# Altium PCB volt_sense.PcbDoc
Units mil, origin at the board's own origin, x right, y up, seen from the top; angles counter-clockwise.
Board outline 1299.21 x 4291.34 mil, 2 copper layers (Top Layer, Bottom Layer); 25 components, 14 nets, 66 pads, 3 vias.
Unrouted connection lines stored in the file: 5.
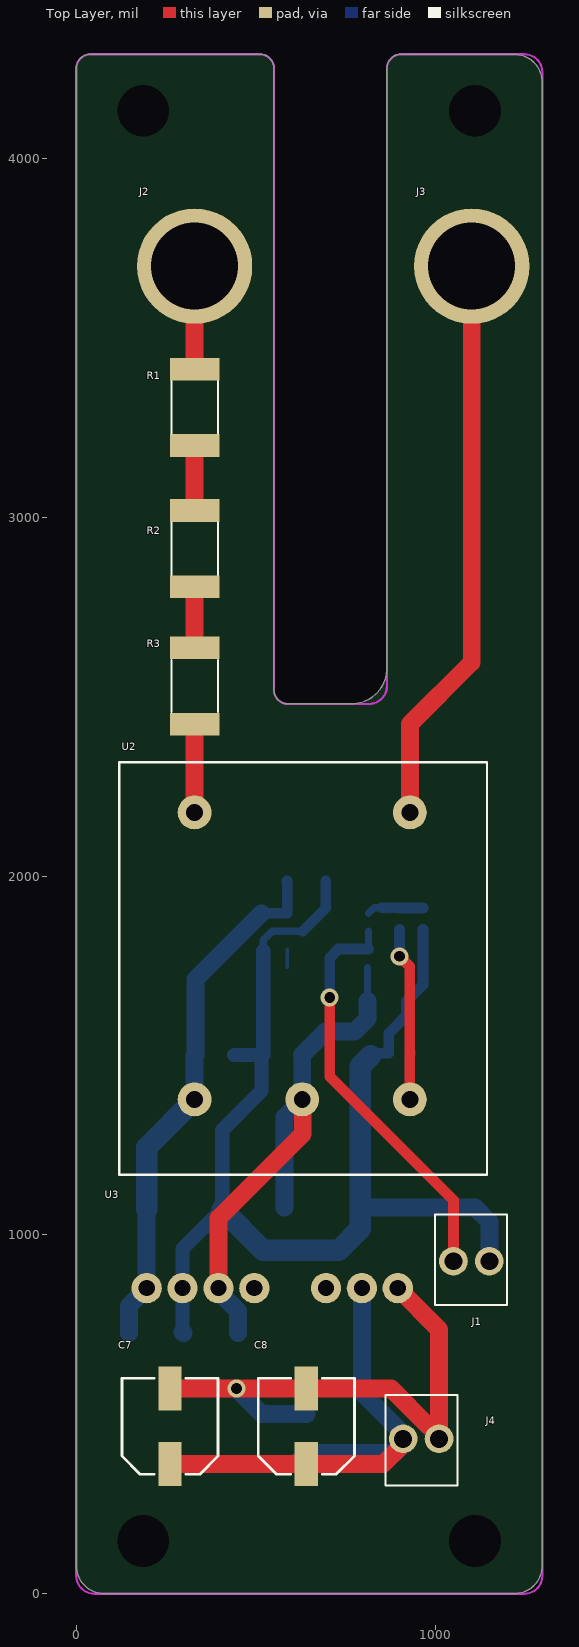
[diagram p0: Top Layer view]
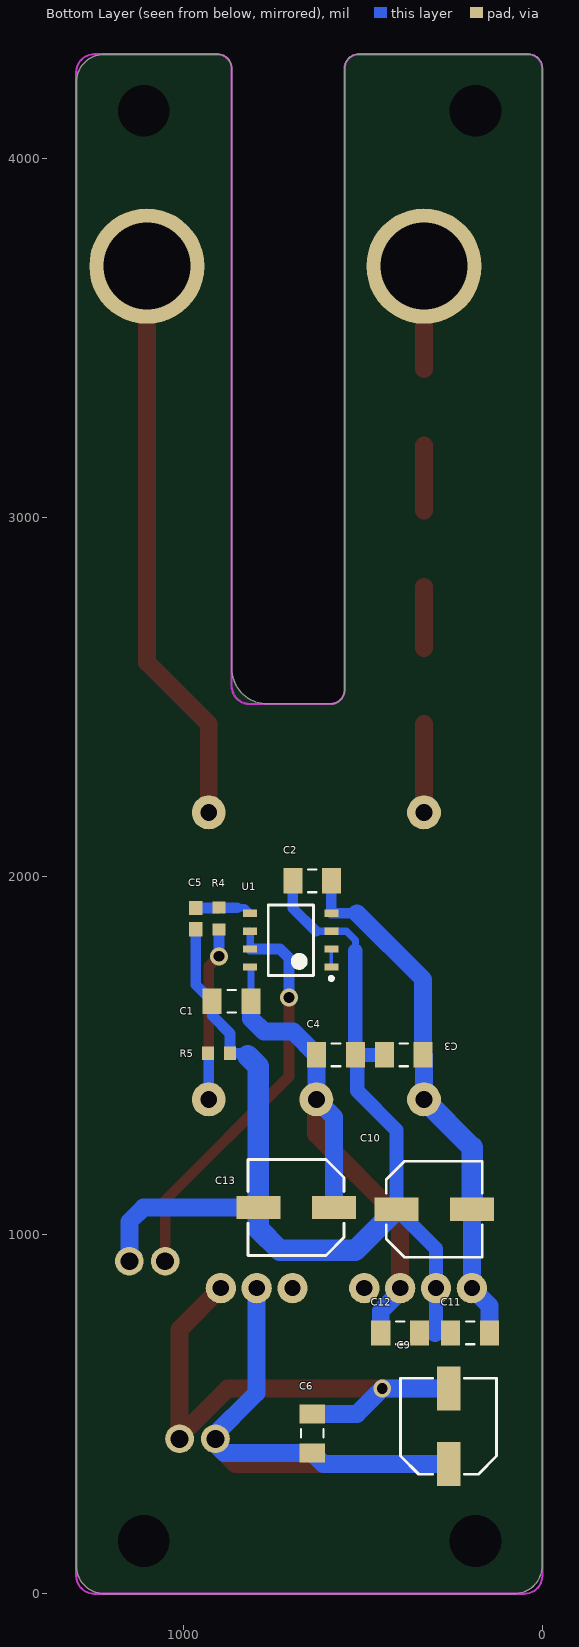
[diagram p1: Bottom Layer view, seen from below]

## Layer stack, top to bottom
Top Solder: solder mask 0.4, Solder Resist, Dk 3.5
Top Layer: signal copper 1.4
Dielectric 1: dielectric 12.6, FR-4, Dk 4.8
Bottom Layer: signal copper 1.4
Bottom Solder: solder mask 0.4, Solder Resist, Dk 3.5

## Board outline
0,4251.97 cw(c39.37,4251.97) 39.37,4291.34 511.81,4291.34 cw(c511.81,4251.97) 551.18,4251.97 551.18,2519.68 ccw(c590.55,2519.68) 590.55,2480.32 766.14,2480.32 ccw(c766.14,2580.32) 866.14,2580.32 866.14,4251.97 cw(c905.51,4251.97) 905.51,4291.34 1220.47,4291.34 cw(c1220.47,4212.6) 1299.21,4212.6 1299.21,78.74 cw(c1220.47,78.74) 1220.47,0 78.74,0 cw(c78.74,78.74) 0,78.74

## Design rules (kind name [scope] priority, off if disabled: settings)
Clearance [All] p1: gap=10 ignorepadtopadclearanceinfootprint=FALSE except(0: Arc-Hole Track-Hole SMDPad-Hole THPad-Hole Via-Hole Fill-Hole Poly-Hole Region-Hole Text-Hole)
PolygonConnect [All] p1: connectstyle=Relief reliefconductorwidth=10 reliefentries=4 polygonreliefangle="90 Angle" airgapwidth=10
RoutingVias [All] p1: holewidth=28 width=50 viastyle="Through Hole" minholewidth=28 minwidth=50 maxholewidth=28 maxwidth=50
SolderMaskExpansion [All] p1: expansion=4
Width [All] p1: maxlimit=100 minlimit=10 preferedwidth=10
30 further rules are at their usual default settings.

## Components (designator, comment, footprint, x,y, rotation, side; value= is the part's Value field where it differs from the comment)
C1 "33nF" C1206 866.3,1651.89 r0 bottom
C2 "33nF" C1206 641.3,1986.89 r0 bottom
C3 "33nF" C1206 386.3,1501.89 r0 bottom
C4 "33nF" C1206 575.31,1501.89 r180 bottom
C5 "100p" C0603 966.3,1881.89 r90 bottom
C6 "33nF" C1206 641.3,446.89 r270 bottom
C7 "47uF" CAPAE7266X82N 261.3,466.89 r90 top
C8 "47uF" CAPAE7266X82N 641.3,466.89 r90 top
C9 "47uF" CAPAE7266X82N 261.3,466.89 r90 bottom
C10 "47uF" CAPAE7266X82N 301.3,1071.89 r180 bottom
C11 "33nF" C1206 201.3,726.89 r180 bottom
C12 "33nF" C1206 396.3,726.89 r0 bottom
C13 "47uF" CAPAE7266X82N 686.3,1076.89 r0 bottom
J1 "2pin conn" 2pin_0.1in 1051.3,926.89 r0 top
J2 "Jack Conn" 575-4 329.92,3700.79 r0 top
J3 "Jack Conn" 575-4 1102.36,3700.79 r0 top
J4 "2pin conn" 2pin_0.1in 1011.3,431.89 r180 top
R1 "2M, 2W" R2512 329.92,3307.09 r270 top
R2 "2M, 2W" R2512 329.92,2913.39 r270 top
R3 "2M, 2W" R2512 329.92,2530.32 r270 top
R4 "10k" R0603 901.3,1881.89 r90 bottom
R5 "887R" R0603 901.3,1506.89 r0 bottom
U1 "Opamp, 1.1MHz" SO8 701.3,1821.89 r0 bottom
U2 "LV25" LV25-P 329.92,2177.95 r0 top
U3 "RS-2412D" RS2412D 896.3,851.89 r180 top

## Footprints (in the part's own frame and the unit in brackets; to place one, negate y for a bottom-side part, rotate by r counter-clockwise, add the part's x,y. Pads: shape width x height; smd on the part's side, far side on the other; paste and mask are expansions set on the pad)
2pin_0.1in [mil] "2 pin white connector"
  round 80 hole 50: 1(0,0) 2(100,0)
  silkscreen extent -51,-122 150,130, body extent -49,-122 151,128, height 421
575-4 [mm] "CONN BANANA JACK SOLDER"
  round 8.16 hole 6.16: 1(0,0)
  body extent -3.92,-3.66 4,4.26, height 2.37
C0603 [mm] "MLCC 0603 footprint"
  rect 1x0.95 smd: 1(-0.75,0) 2(0.75,0)
  body extent -0.85,-0.45 0.85,0.45, height 0.9
C1206 [mm] "MLCC 1206 footprint"
  rect 1.35x1.8 smd: 1(-1.375,0) 2(1.375,0)
  silkscreen extent -0.3,-0.8 0.3,0.8, body extent -1.7,-0.9 1.7,0.9, height 1.8
CAPAE7266X82N [mm] "Aluminum Electrolytic Capacitor, Body 6.60x6.60x8.20mm, IPC Medium Density"
  rect 3.1x1.65 smd: 1(-2.675,0) 2(2.675,0)
  silkscreen extent -3.4,-3.4 3.4,3.4, body extent -3.4,-3.4 3.4,3.4, height 8.2
LV25-P [mm] "Voltage sensor"
  round 2.4 hole 1.2: 1(15.24,0) 2(0,0) 3(0,-20.32) 4(7.62,-20.32) 5(15.24,-20.32)
  silkscreen extent -5.33,-25.65 20.7,3.56, body extent -5.46,-25.65 20.54,3.55, height 16.51
R0603 [mm] "SMD 0603 resistor footprint"
  rect 0.85x0.95 smd: 1(-0.775,0) 2(0.775,0)
  body extent -0.85,-0.48 0.85,0.48, height 0.6
R2512 [mm] "Chip resistance 2512 footprint"
  rect 1.6x3.5 smd: 1(-2.7,0) 2(2.7,0)
  silkscreen extent -1.85,-1.65 1.85,1.65, body extent -3.25,-1.7 3.25,1.7, height 0.65
RS2412D [mm] "DC DC CONVERTER +/-12V 2W"
  round 2.15 hole 1.15: 1(0,0) 2(2.54,0) 3(5.08,0) 5(10.16,0) 6(12.7,0) 7(15.24,0) 8(17.78,0)
  body extent -1.8,-6 20,3.2, height 11.11
SO8 [mm]
  rect 0.99x0.51 smd: 1(-2.87,1.905) 2(-2.87,0.635) 3(-2.87,-0.635) 4(-2.87,-1.905) 5(2.87,-1.905) 6(2.87,-0.635) 7(2.87,0.635) 8(2.87,1.905)
  silkscreen extent -2.99,-2.5 1.6,2.83, body extent -2,-2.5 2,2.5, height 1.75

## Part data
C1 C2 C3 C4 C6 C11 C12: library part CL31B333JBCNNNC, "Cap Ceramic 0.033uF 50V X7R 5% SMD 1206 125C Paper T/R", Case/Package=1206, Case Code (Metric)=3216, Dielectric=X7R, Manufacturer=Samsung, Max Operating Temperature=125°C, Min Operating Temperature=-55°C, Package Quantity=1, Supplier Part Number 1=1276-1774-6-ND, Tolerance=5%, Voltage=50V, Capacitance=33nF, Case Code (Imperial)=1206, Depth=1.6mm, Height=0.85mm, Lead Free="Lead Free", Length=3.2mm, Manufacturer Part Number=CL31B333JBCNNNC, Mount="Surface Mount", Packaging="Tape and Reel", Pricing 1="1=0.18, 10=0.131, 100=0.0614, 500=0.04308, 1000=0.03567 (USD)", Radiation Hardening=No, Stock 1=21, Supplier 1=Digi-Key, Thickness=0.039inch, Voltage Rating=50V, Voltage Rating (DC)=50V, Width=0.063inch
C5: library part 06035C101KAT2A, "Cap Ceramic 100pF 50V X7R 10% SMD 0603 125C T/R", Capacitance=100pF, Case/Package=0603, Case Code (Metric)=1608, Dielectric=X7R, Dielectric Material=Ceramic, Manufacturer="Kyocera AVX", Max Operating Temperature=125°C, Min Operating Temperature=-55°C, Package Quantity=1, Supplier Part Number 1=581-06035C101K, Temperature Coefficient=0ppm/°C, Tolerance=10%, Voltage Rating=50V, Case Code (Imperial)=0603, ComponentLink1Description=http://www.mouser.com/ds/2/40/X7RDielectric-777024.pdf?src-supplier=Mouser, ComponentLink1URL=http://www.mouser.com/ds/2/40/X7RDielectric-777024.pdf?src-supplier=Mouser, ComponentLink2Description=http://www.farnell.com/datasheets/1679506.pdf?src-supplier=Element14, ComponentLink2URL=http://www.farnell.com/datasheets/1679506.pdf?src-supplier=Element14, ComponentLink3Description=http://www.jameco.com/Jameco/Products/ProdDS/2012486.pdf?src-supplier=Jameco, ComponentLink3URL=http://www.jameco.com/Jameco/Products/ProdDS/2012486.pdf?src-supplier=Jameco, ComponentLink4Description=http://www.avx.com/docs/Catalogs/cx7r.pdf?src-supplier=Future+Electronics, ComponentLink4URL=http://www.avx.com/docs/Catalogs/cx7r.pdf?src-supplier=Future+Electronics, ComponentLink5Description=http://catalogs.avx.com/SurfaceMount.pdf?src-supplier=Digi-Key, ComponentLink5URL=http://catalogs.avx.com/SurfaceMount.pdf?src-supplier=Digi-Key, Contact Plating=Tin,Matte, Depth=0.81mm, Dissipation Factor=2.5%, Lead Free="Lead Free", Length=1.6mm, Manufacturer Part Number=06035C101KAT2A, Mount="Surface Mount", Number of Pins=2, Packaging="Tape and Reel", Pricing 1="1=0.27, 10=0.181, 50=0.181, 100=0.091, 1000=0.055, 10000=0.038 (USD)", Radiation Hardening=No, REACH SVHC="No SVHC", Stock 1=28330, Supplier 1=Mouser, Termination=SMD/SMT, Thickness=0.035inch, Voltage Rating (DC)=50V, Width=0.032inch
C7 C8 C9 C10 C13: library part UCD1H470MCL1GS, "Aluminum Electrolytic Capacitors - SMD 47uF 50V 105c", Case/Package=Radial, Leakage Current=493.5uA, Manufacturer=Nichicon, Max Operating Temperature=105°C, Min Operating Temperature=-55°C, Package Quantity=1, Ripple Current=195mA, Supplier Part Number 1=493-6183-6-ND, Tolerance=20%, Voltage=50V, Capacitance=47uF, ComponentLink1Description=http://www.nichicon.co.jp/english/products/pdfs/e-cd.pdf, ComponentLink1URL=http://www.nichicon.co.jp/english/products/pdfs/e-cd.pdf, ComponentLink2Description=http://nichicon-us.com/english/products/pdfs/e-ucd.pdf, ComponentLink2URL=http://nichicon-us.com/english/products/pdfs/e-ucd.pdf, ComponentLink3Description=http://uk.rs-online.com/webdocs/0ebd/0900766b80ebdadd.pdf, ComponentLink3URL=http://uk.rs-online.com/webdocs/0ebd/0900766b80ebdadd.pdf, ComponentLink4Description=http://products.nichicon.co.jp/en/pdf/XJA043/e-cd.pdf, ComponentLink4URL=http://products.nichicon.co.jp/en/pdf/XJA043/e-cd.pdf, Diameter=6.3mm, Dissipation Factor=0.1%, Height=7.7mm, Height - Seated (Max)=0.315inch, Impedance=630mR, Lead Free="Lead Free", Length=7.7mm, Life (Hours)=2000Hour, Manufacturer Part Number=UCD1H470MCL1GS, Mount="Surface Mount", Packaging="Tape and Reel", Pricing 1="1=0.55, 10=0.39, 100=0.2566 (USD)", Radiation Hardening=No, Stock 1=232, Supplier 1=Digi-Key, Termination=SMD/SMT, Voltage Rating=50V, Voltage Rating (DC)=50V
J1 J4: library part 640456-2, "CONN HEADER VERT 2POS 2.54MM", Color=Natural,White,Beige, Contact Current Rating=5A, Contact Resistance=6mR, Flammability Rating="UL94 V-0", Housing Color=Natural, Manufacturer="TE Connectivity", Max Operating Temperature=221°C, Max Voltage Rating (AC)=250V, Min Operating Temperature=-67°C, Package Quantity=5000, Supplier Part Number 1=A1921-ND, Approvals=CSA, Backwall/Post Interruptions="No (Without)", Circuit Application=Signal, ComponentLink1Description=https://www.te.com/commerce/DocumentDelivery/DDEController?Action=srchrtrv&DocNm=640456&DocType=Customer+Drawing&DocLang=English&src-supplier=Digi-Key, ComponentLink1URL=https://www.te.com/commerce/DocumentDelivery/DDEController?Action=srchrtrv&DocNm=640456&DocType=Customer+Drawing&DocLang=English&src-supplier=Digi-Key, ComponentLink2Description=http://www.te.com/commerce/DocumentDelivery/DDEController?Action=showdoc&DocId=Data+Sheet%7F82056_MTA%7F0608%7Fpdf%7FEnglish%7FENG_DS_82056_MTA_0608.pdf%7F640456-6&src-supplier=Avnet, ComponentLink2URL=http://www.te.com/commerce/DocumentDelivery/DDEController?Action=showdoc&DocId=Data+Sheet%7F82056_MTA%7F0608%7Fpdf%7FEnglish%7FENG_DS_82056_MTA_0608.pdf%7F640456-6&src-supplier=Avnet, ComponentLink3Description=https://www.distrelec.biz/Web/Downloads/43/01/04384301.pdf?mime=application%2Fpdf&src-supplier=Distrelec, ComponentLink3URL=https://www.distrelec.biz/Web/Downloads/43/01/04384301.pdf?mime=application%2Fpdf&src-supplier=Distrelec, ComponentLink4Description=http://www.farnell.com/datasheets/2043229.pdf?src-supplier=Newark, ComponentLink4URL=http://www.farnell.com/datasheets/2043229.pdf?src-supplier=Newark, ComponentLink5Description=http://www.te.com/commerce/DocumentDelivery/DDEController?Action=showdoc&DocId=Data+Sheet%7F82056_MTA%7F0608%7Fpdf%7FEnglish%7FENG_DS_82056_MTA_0608.pdf%7F640456-2&src-supplier=Future+Electronics, ComponentLink5URL=http://www.te.com/commerce/DocumentDelivery/DDEController?Action=showdoc&DocId=Data+Sheet%7F82056_MTA%7F0608%7Fpdf%7FEnglish%7FENG_DS_82056_MTA_0608.pdf%7F640456-2&src-supplier=Future+Electronics, ComponentLink6Description=http://www.te.com/commerce/DocumentDelivery/DDEController?Action=showdoc&DocId=Data+Sheet%7F82056_MTA%7F0608%7Fpdf%7FEnglish%7FENG_DS_82056_MTA_0608.pdf%7F640456-6&src-supplier=Avnet+Asia, ComponentLink6URL=http://www.te.com/commerce/DocumentDelivery/DDEController?Action=showdoc&DocId=Data+Sheet%7F82056_MTA%7F0608%7Fpdf%7FEnglish%7FENG_DS_82056_MTA_0608.pdf%7F640456-6&src-supplier=Avnet+Asia, Connector System=Wire-to-Board, Connector Type=Connector,Pin,Plug,Header, Contact Gender=Male, Contact Material="Copper Alloy", Contact Mating Length=7.49mm, Contact Plating=Tin, Contact Post Length=3.56mm, Contact Retention="No (Without)", Contact Shape=Square, Contact Style=Straight, Current Rating=5A, Depth=5.72mm, ELV=Compliant, Fastening Type=Friction, Gender=Male, Height=7.87mm, Housing Material=Polyester, Lead Free="Lead Free", Lead Pitch=2.54mm, Length=7.62mm, Manufacturer Part Number=640456-2, Mating Alignment="No (Without)", Mating Connector Lock="Yes (With)", Mating Retention="No (Without)", Mount="Through Hole", Mounting Ears="No (Without)", Number of Contacts=2, Number of Poles=2, Number of Positions=2, Number of Rows=1, Orientation=Straight, Packaging=Bulk, Panel Mount Retention="No (Without)", PCB Mount Alignment="No (Without)", PCB Mounting Orientation=Vertical, PCB Mount Retention=Without, PCB Thickness=0.063inch, Pitch=2.54mm, Plating Thickness=3.81um, Pricing 1="1=0.11, 10=0.107, 100=0.0663, 500=0.05486, 1000=0.048, 5000=0.04114, 10000=0.04 (USD)", Radiation Hardening=No, REACH SVHC="No SVHC", Sealable="No (Without)", Shrouded="No (Without)", Stock 1=105696, Strain Relief="No (Without)", Supplier 1=Digi-Key, Tail Length=0.14inch, Termination=Solder, Voltage Rating=250V, Voltage Rating (AC)=250V, Working Voltage=250V
J2 J3: library part 575-4, "JACK NON-INSULATED .218\"", Color=White, Manufacturer="Keystone Electronics", Package Quantity=100, Supplier Part Number 1=36-575-4-ND, ComponentLink1Description=http://www.mouser.com/ds/2/215/75-4_575-8-743912.pdf?src-supplier=Mouser, ComponentLink1URL=http://www.mouser.com/ds/2/215/75-4_575-8-743912.pdf?src-supplier=Mouser, ComponentLink2Description=http://www.keyelco.com/pdfs/M60/M60p107.pdf?src-supplier=Digi-Key, ComponentLink2URL=http://www.keyelco.com/pdfs/M60/M60p107.pdf?src-supplier=Digi-Key, Contact Material=Brass, Contact Plating=Nickel, Gender=Female, Insulation=Non-Insulated, Lead Free="Lead Free", Manufacturer Part Number=575-4, Material=Brass,Tin, Mount="Panel,Through Hole", Number of Pins=1, Number of Positions=1, Packaging=Bulk, Pricing 1="1=0.84, 10=0.692, 50=0.6244, 250=0.543, 1000=0.4558, 2500=0.4073, 5000=0.3801 (USD)", Stock 1=21251, Supplier 1=Digi-Key, Termination=Solder
R1 R2 R3: library part SMV2W1M2JT, Manufacturer="TE Connectivity", Supplier Part Number 1=279-SMV2W1M2JT, Manufacturer Part Number=SMV2W1M2JT, Pricing 1="1=0.71, 10=0.481, 50=0.481, 100=0.354, 1000=0.204, 10000=0.193 (USD)", Stock 1=1000, Supplier 1=Mouser
R4: library part RNCP0603FTD10K0, "RES 10K OHM 1% 1/8W 0603", Case/Package=0603, Case Code (Metric)=1608, Manufacturer="Stackpole Electronics", Max Operating Temperature=155°C, Max Power Dissipation=125mW, Min Operating Temperature=-55°C, Resistance=10kR, Supplier Part Number 1=RNCP0603FTD10K0CT-ND, Temperature Coefficient=100ppm/°C, Tolerance=1%, Case Code (Imperial)=0603, Composition="Thin Film", Contact Plating=Tin,Matte, Features="Moisture Resistant,Anti-Sulfur", Height=0.02inch, Lead Free="Lead Free", Length=0.059inch, Manufacturer Part Number=RNCP0603FTD10K0, Mount="Surface Mount", Number of Terminations=2, Packaging="Tape and Reel", Pricing 1="1=0.1, 10=0.067, 100=0.0273, 1000=0.01224, 2500=0.01063 (USD)", Radiation Hardening=No, Stock 1=166858, Supplier 1=Digi-Key, Width=0.031inch
R5: library part ERA-3AEB8870V, "RES SMD 887 OHM 0.1% 1/10W 0603", Case/Package=0603, Case Code (Metric)=1608, Manufacturer=Panasonic, Max Operating Temperature=155°C, Max Power Dissipation=100mW, Min Operating Temperature=-55°C, Supplier Part Number 1=P887DBDKR-ND, Temperature Coefficient=25ppm/°C, Tolerance=0.1%, Case Code (Imperial)=0603, Composition="Thin Film", Features="Automotive AEC-Q200", Height - Seated (Max)=0.022inch, Length=0.063inch, Manufacturer Part Number=ERA-3AEB8870V, Number of Terminations=2, Packaging="Tape and Reel", Pricing 1="1=0.35, 10=0.3, 100=0.1172, 1000=0.04906, 2500=0.04498 (USD)", Resistance=887R, Stock 1=18104, Supplier 1=Digi-Key, Width=0.032inch
U1: library part LM358DT, "IC OPAMP GP 1.1MHZ 8SO", Case/Package=SOIC, Dual Supply Voltage=9V, Input Bias Current=150nA, Input Offset Voltage (Vos)=7mV, Manufacturer=STMicroelectronics, Max Dual Supply Voltage=15V, Max Input Voltage=28.5V, Max Operating Temperature=70°C, Max Output Current=60mA, Max Supply Voltage=30V, Min Dual Supply Voltage=1.5V, Min Input Voltage=0uV, Min Operating Temperature=0°C, Min Supply Voltage=3V, Nominal Supply Current=1.2mA, Operating Supply Current=700uA, Output Current=40mA, Package Quantity=2500, Supplier Part Number 1=497-1591-6-ND, Voltage Gain=100dB, Bandwidth=1.1MHz, Common Mode Rejection Ratio=70dB, ComponentLink1Description=http://www.st.com/content/ccc/resource/technical/document/datasheet/61/46/87/01/98/ed/44/c5/CD00000464.pdf/files/CD00000464.pdf/jcr:content/translations/en.CD00000464.pdf?src-supplier=Digi-Key, ComponentLink1URL=http://www.st.com/content/ccc/resource/technical/document/datasheet/61/46/87/01/98/ed/44/c5/CD00000464.pdf/files/CD00000464.pdf/jcr:content/translations/en.CD00000464.pdf?src-supplier=Digi-Key, ComponentLink2Description=http://www.st.com/web/en/resource/technical/document/datasheet/CD00000464.pdf?src-supplier=Future+Electronics, ComponentLink2URL=http://www.st.com/web/en/resource/technical/document/datasheet/CD00000464.pdf?src-supplier=Future+Electronics, ComponentLink3Description=http://www.alliedelec.com/images/products/datasheets/bm/STMICROELECTRONICS/70013561.pdf?src-supplier=Allied+Electronics, ComponentLink3URL=http://www.alliedelec.com/images/products/datasheets/bm/STMICROELECTRONICS/70013561.pdf?src-supplier=Allied+Electronics, ComponentLink4Description=https://www.verical.com/server-webapp/html/getDatasheet?partID=39583&src-supplier=Verical, ComponentLink4URL=https://www.verical.com/server-webapp/html/getDatasheet?partID=39583&src-supplier=Verical, ComponentLink5Description=http://datasheet.iiic.cc/stmicroelectronics/LM358DT.pdf?src-supplier=IIIC, ComponentLink5URL=http://datasheet.iiic.cc/stmicroelectronics/LM358DT.pdf?src-supplier=IIIC, ComponentLink6Description=http://www.produktinfo.conrad.com/datenblaetter/150000-174999/155599-da-01-en-OP_VERST_LM358DT_STM.pdf?src-supplier=Conrad, ComponentLink6URL=http://www.produktinfo.conrad.com/datenblaetter/150000-174999/155599-da-01-en-OP_VERST_LM358DT_STM.pdf?src-supplier=Conrad, Contact Plating=Tin,Matte, Gain Bandwidth Product=1.1MHz, Height=1.25mm, Lead Free="Lead Free", Length=4.9mm, Manufacturer Part Number=LM358DT, Mount="Surface Mount", Number of Amplifiers=2, Number of Channels=2, Number of Circuits=2, Number of Elements=2, Number of Pins=8, Operating Supply Voltage=15V, Output Current per Channel=60mA, Packaging="Tape and Reel", Pricing 1="1=0.48, 10=0.359, 100=0.2239, 500=0.1532, 1000=0.11784 (USD)", Radiation Hardening=No, REACH SVHC="No SVHC", Slew Rate=0.6V/µs, Stock 1=82250, Supplier 1=Digi-Key, Unity Gain Bandwidth Product=1.1MHz, Weight=0.01lb, Width=3.9mm
U2: library part LV25-P, Current Rating=10mA, Manufacturer=LEM, Max Operating Temperature=70°C, Max Output Current=25mA, Max Supply Voltage=15V, Min Operating Temperature=0°C, Min Supply Voltage=-15V, Supplier Part Number 1=398-1019-ND, Accuracy=0.9%, ComponentLink1Description=https://www.lem.com/sites/default/files/products_datasheets/lv_25-p.pdf?src-supplier=Digi-Key, ComponentLink1URL=https://www.lem.com/sites/default/files/products_datasheets/lv_25-p.pdf?src-supplier=Digi-Key, ComponentLink2Description=https://www.distrelec.biz/Web/Downloads/_t/ds/LV25P_eng_tds.pdf?mime=application%2Fpdf&src-supplier=Distrelec, ComponentLink2URL=https://www.distrelec.biz/Web/Downloads/_t/ds/LV25P_eng_tds.pdf?mime=application%2Fpdf&src-supplier=Distrelec, ComponentLink3Description=http://www.farnell.com/datasheets/51633.pdf?src-supplier=Newark, ComponentLink3URL=http://www.farnell.com/datasheets/51633.pdf?src-supplier=Newark, ComponentLink4Description=http://www.farnell.com/datasheets/1866272.pdf?src-supplier=Element14, ComponentLink4URL=http://www.farnell.com/datasheets/1866272.pdf?src-supplier=Element14, ComponentLink5Description=http://datasheet.iiic.cc/lem/LV25-P.pdf?src-supplier=IIIC, ComponentLink5URL=http://datasheet.iiic.cc/lem/LV25-P.pdf?src-supplier=IIIC, Height=15.1mm, Input Current=10mA, Lead Free="Contains Lead", Manufacturer Part Number=LV25-P, Mount=PCB, Output Type=Voltage, Pricing 1="1=68, 5=64.6, 10=59.5, 25=52.7, 50=51, 100=49.3 (USD)", REACH SVHC="No SVHC", Response Time=40us, Secondary Current=25mA, Stock 1=51, Supplier 1=Digi-Key, Width=26mm
U3: "CONV DC/DC 2W DL +/-12V OUT SIP8", Case/Package=SIP, Current - Output 1=83mA, Current - Output 2=-83mA, Isolation Voltage=1kV, Manufacturer=Recom, Max Input Voltage=36V, Max Operating Temperature=85°C, Max Output Power=2W, Max Output Voltage=12V, Min Input Voltage=18V, Min Operating Temperature=-40°C, Nominal Input Voltage=24V, Nominal Output Voltage=-12V, Package Quantity=22, Supplier Part Number 1=945-1315-ND, ComponentLink1Description=http://uk.rs-online.com/webdocs/135e/0900766b8135ed55.pdf?src-supplier=RSComponents, ComponentLink1URL=http://uk.rs-online.com/webdocs/135e/0900766b8135ed55.pdf?src-supplier=RSComponents, ComponentLink2Description=https://www.recom-power.com/pdf/Econoline/RS-S_D_Z.pdf?src-supplier=Digi-Key, ComponentLink2URL=https://www.recom-power.com/pdf/Econoline/RS-S_D_Z.pdf?src-supplier=Digi-Key, ComponentLink3Description=https://www.distrelec.biz/Web/Downloads/ry/rs/ryRS.pdf?mime=application%2Fpdf&src-supplier=Distrelec, ComponentLink3URL=https://www.distrelec.biz/Web/Downloads/ry/rs/ryRS.pdf?mime=application%2Fpdf&src-supplier=Distrelec, ComponentLink4Description=http://www.recom-international.com/pdf/Econoline/RS-S_D_Z.pdf?src-supplier=Future+Electronics, ComponentLink4URL=http://www.recom-international.com/pdf/Econoline/RS-S_D_Z.pdf?src-supplier=Future+Electronics, ComponentLink5Description=http://www.produktinfo.conrad.com/datenblaetter/150000-174999/154843-da-01-en-DC_DC_WANDLER.pdf?src-supplier=Conrad, ComponentLink5URL=http://www.produktinfo.conrad.com/datenblaetter/150000-174999/154843-da-01-en-DC_DC_WANDLER.pdf?src-supplier=Conrad, Depth=21.8mm, Efficiency=83%, Features=SCP, Height=11.1mm, Isolation=Isolated, Lead Free="Lead Free", Length=21.8mm, Manufacturer Part Number=RS-2412D, Max Input Voltage (DC)=36V, Max Output Current=83mA, Max Power Dissipation=2W, Min Input Voltage (DC)=18V, Mount="Through Hole,PCB", Number of Outputs=2, Number of Pins=7, Output Current=83mA, Output Power=2W, Output Voltage=12V, Packaging=Rail/Tube, Power Rating=2W, Pricing 1="1=15.96, 5=15.834, 22=15.71364, 44=15.47205, 66=14.98848, 110=13.538, 264=13.29625, 506=13.05451 (USD)", REACH SVHC="No SVHC", Stock 1=391, Supplier 1=Digi-Key, Voltage - Output 1=12V, Voltage - Output 2=-12V, Weight=4.7g, Width=9.2mm

## Free pads (board coordinates)
  round 0 hole 144.09: 4(186.3,146.89) 4(186.3,4133.86) 4(1111.3,146.89) 4(1111.3,4133.86)

## Via types
v1: diameter 50, hole 30, Top Layer to Bottom Layer, tented both sides, 3 vias

## Nets (pads, with @x,y where several pads share a name; then routed paths per layer and width w, separated by ;. In a path a pad name is that pad's centre, name@x,y a point inside that pad or via, vN(x,y) a via of type N, cw(c..) or ccw(c..) an arc to the next point about the centre after c; other vN are vias at no path point)
+12V: C1.1 C4.1 C12.2 C13.1 U1.8 U2.4 U3.6 | length 1583.4
  Top Layer w50: U3.6 396.3,1046.89 631.3,1281.89 631.3,1376.57 U2.4
  Bottom Layer w20: C1.1 U1.8@812.17,1744.76
  Bottom Layer w50: U3.6 396.3,842.54 450.43,788.4 C12.2 ; C13.1 580.98,1329.02 U2.4 629.92,1501.42 C4.1 694.45,1566.89 776.3,1566.89 812.17,1602.76 C1.1
+24V: C6.2 C7.1 C8.1 C9.1 J4.2 U3.2 | length 1859.6
  Top Layer w50: C7.1 C8.1 855.55,361.57 J4.2@925.2,431.22
  Bottom Layer w50: C9.1 610.12,361.57 C6.2 886.73,392.76 925.2,431.22 796.3,560.12 U3.2
-12V: C2.1 C3.1 C10.2 C11.2 U1.4 U2.5 U3.8 | length 1485.6
  Bottom Layer w30: 516.3,1896.89 U1.4 588.31,1985.75 C2.1
  Bottom Layer w50: C11.2 147.17,802.76 U3.8 196.3,1071.57 C10.2 ; 329.92,1377.95 329.92,1499.65 C3.1 332.17,1712.76 516.3,1896.89
  Bottom Layer w60: C10.2 195.98,1244.02 329.92,1377.95
-24V: C6.1 C7.2 C8.2 C9.2 J4.1 U3.1 | length 1643.1
  Top Layer w50: C7.2 C8.2 877.05,572.2 982.79,466.47 ; U3.1 1011.3,736.89 J4.1 J4.1@1011.3,431.22
  Bottom Layer w50: C9.2 261.61,571.89 v1(446.3,571.89) 517.17,501.02 C6.1
GND: C1.2 C2.2 C3.2 C4.2 C5.1 C10.1 C11.1 C12.1 C13.2 J1.2 R5.1 U1.3 U3.7 | length 3433
  Bottom Layer w20: 521.18,1791.89 521.18,1821.77 546.3,1846.89 U1.3 631.3,1846.89 ; 821.3,1499.65 828.54,1506.89
  Bottom Layer w30: 631.3,1846.89 695.43,1911.02 C2.2 ; 828.54,1506.89 R5.1 870.79,1561.89 920.43,1611.54 C1.2 966.3,1697.76 C5.1
  Bottom Layer w40: 296.3,729.39 U3.7 296.3,961.57 C10.1 406.61,1292.2 516.3,1401.89 516.3,1497.01 C4.2 ; C3.2 C4.2 ; 521.18,1791.89 C4.2
  Bottom Layer w50: 296.3,729.39 298.8,726.89 ; C13.2 1111.3,1076.89 1151.3,1036.89 J1.2
  Bottom Layer w60: C10.1 521.61,956.89 731.3,956.89 791.61,1017.2 C13.2 791.61,1469.96 821.3,1499.65
NetJ2_1: J2.1 R1.1 | length 287.4
  Top Layer w50: R1.1 J2.1
NetJ3_1: J3.1 U2.2 | length 1594.3
  Top Layer w50: 929.92,2177.95 929.92,2424.02 1102.36,2596.46 J3.1
NetR1_2: R1.2 R2.1 | length 181.1
  Top Layer w50: R2.1 R1.2
NetR2_2: R2.2 R3.1 | length 170.5
  Top Layer w50: R3.1 R2.2
NetR3_2: R3.2 U2.1 | length 246.1
  Top Layer w50: 329.92,2177.95 R3.2
NetU1_1: U1.1 U1.2 | length 50
  Bottom Layer w10: U1.1 U1.2
V_sense_ctrl: J1.1 U1.6 U1.7 | length 1156.3
  Top Layer w30: v1(706.3,1661.89) 706.3,1441.89 1051.3,1096.89 J1.1
  Bottom Layer w20: U1.7 U1.6
  Bottom Layer w30: v1(706.3,1661.89) 706.3,1771.89 731.3,1796.89 U1.7
Vm: R4.1 R5.2 U2.3 | length 615
  Top Layer w30: v1(901.3,1776.89) 929.92,1748.27 929.92,1377.95
  Bottom Layer w30: v1(901.3,1776.89) R4.1 ; 929.92,1377.95 929.92,1505 R5.2
Vsense: C5.2 R4.2 U1.5 | length 158.8
  Bottom Layer w20: U1.5 829.8,1912.4 851.3,1912.4
  Bottom Layer w30: 851.3,1912.4 R4.2 902.28,1911.42 C5.2
pads on no net: U3.3 U3.5

## Keep-outs
Keep-Out Layer:
  lines w5.91: 0,50 ccw(c50,50) 50,0 1249.21,0 ccw(c1249.21,50) 1299.21,50 1299.21,4241.34 ccw(c1249.21,4241.34) 1249.21,4291.34 905.51,4291.34 ccw(c905.51,4251.97) 866.14,4251.97 866.14,3700.79 866.14,3070.87 866.14,2530.32 cw(c816.14,2530.32) 816.14,2480.32 708.66,2480.32 590.55,2480.32 cw(c590.55,2519.68) 551.18,2519.68 551.18,4251.97 ccw(c511.81,4251.97) 511.81,4291.34 39.37,4291.34 ccw(c39.37,4251.97) 0,4251.97 0,50